# EAGLE board StepperSynth2.3_Interface (EAGLE 9.2.2)
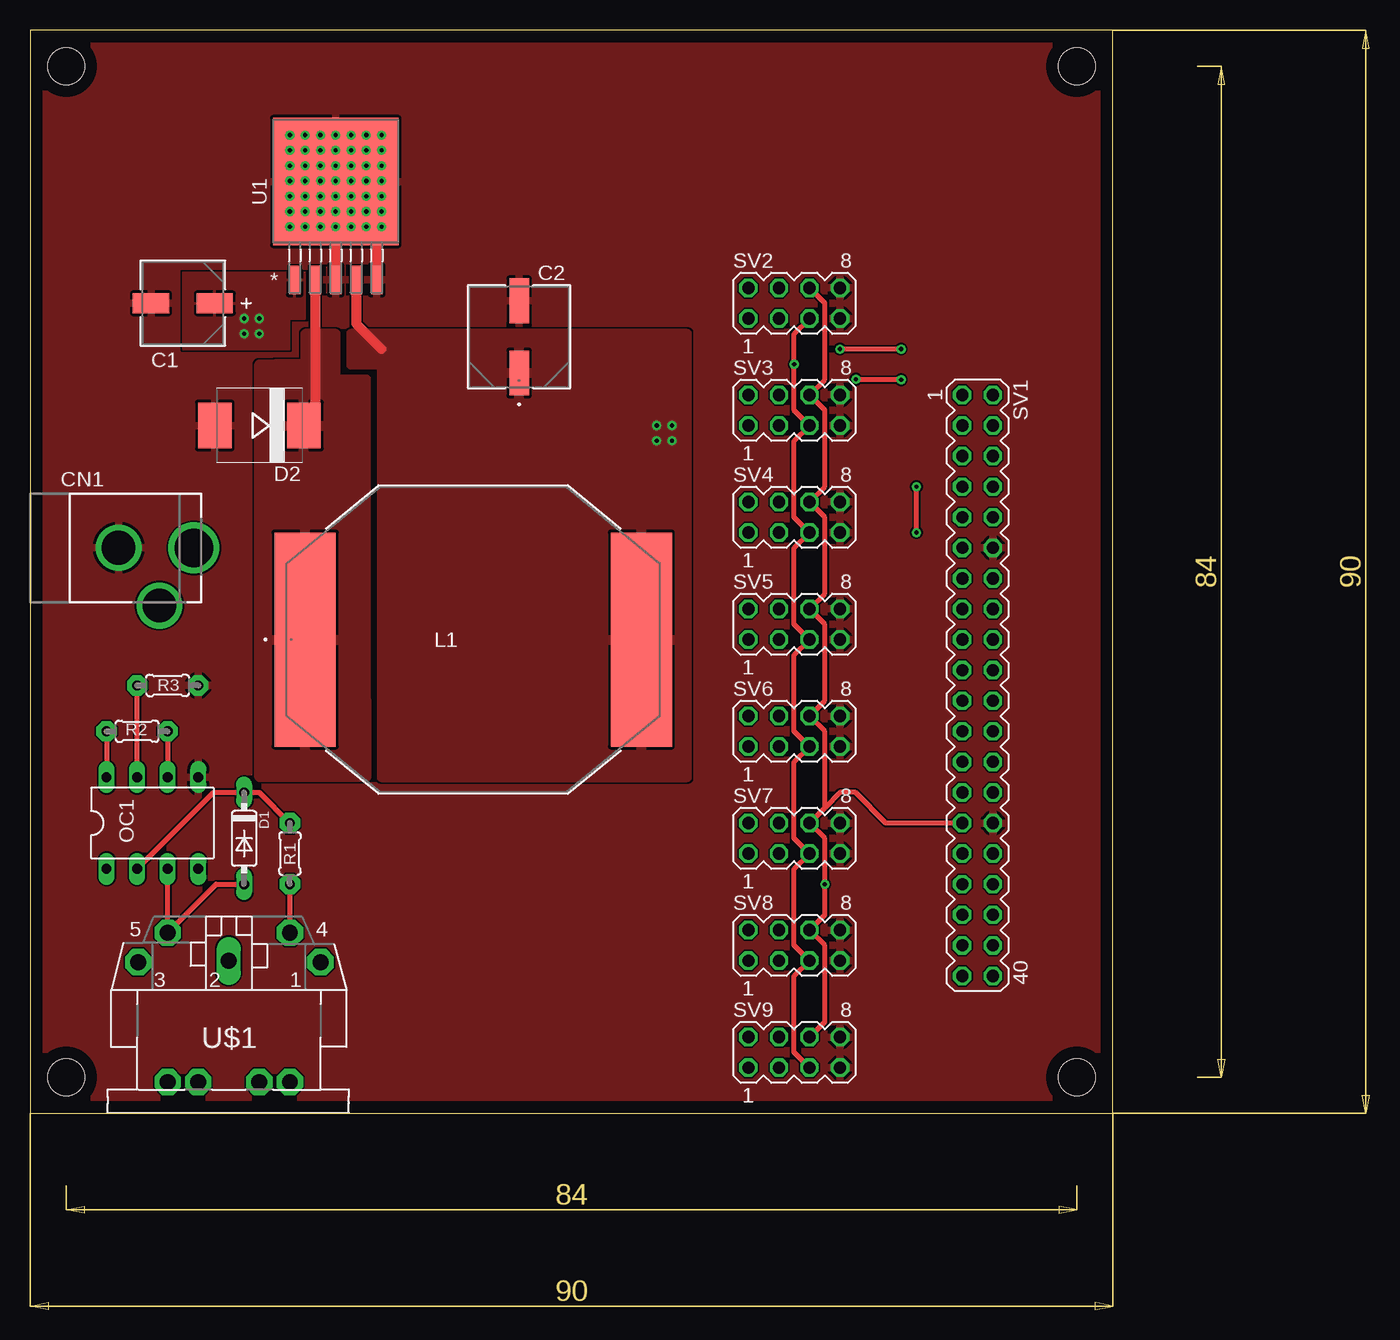
[diagram p0: board, top side]
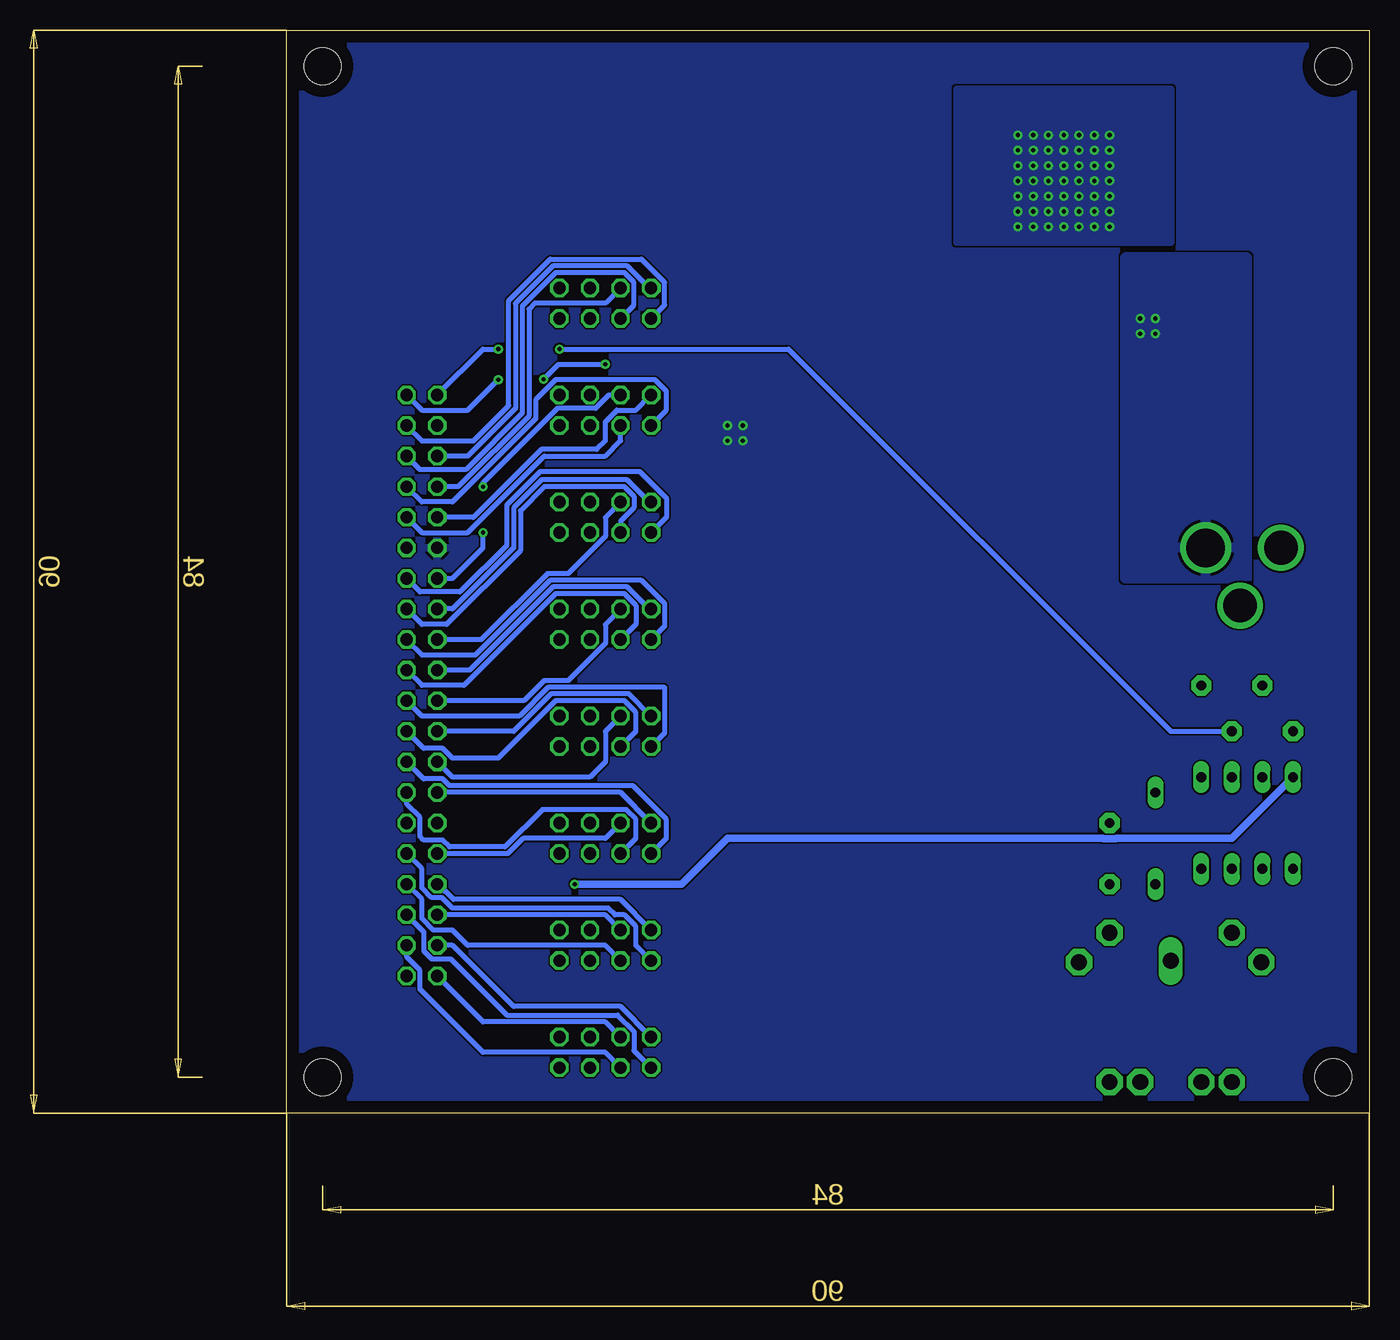
[diagram p1: board, bottom side, seen from below]

Size 90 x 90 mm. Coordinates in mm from the lower left corner, seen from the top.
Outline: 0,0 90,0 90,90 0,90 0,0
Copper layers (1*16): Top 0.035mm / dielectric 1.5mm / Bottom 0.035mm
Design rules "default": minimum track width 6mil, minimum drill 0.35mm, track to track 6mil, track to pad 6mil, pad to pad 6mil, via to via 6mil, smd to smd 6mil, copper to edge 40mil, drill to drill 6mil, minimum pad ring 10mil, minimum via ring 8mil, stop-mask expansion 4mil, vias tented up to drill 0mil, thermal gap 10mil
Holes 3.05 mm at 3,3 87,3 3,87 87,87

## Footprints (pad centres in the part's own frame; a part is rotated, then mirrored left to right if it is on the bottom)
PCAP_SVP_C6-L = smd 2.997 x 1.626: 1 -2.654,0; 2 2.654,0
U2-P-L = smd 3.708 x 1.626: 1 -2.997,0; 2 2.997,0
DCJACK_2MM_PTH = drill 2.8: GND 0,7.35; GNDBREAK 4.8,10.75 | drill 3.2: PWR 0,13.6
DO35-7 = drill 0.813 long: A 3.81,0; C -3.81,0
SMC = smd 2.8 x 3.8: A 3.7,0; C -3.7,0
IND_PM2110 = smd 5.08 x 17.78: 1 -13.97,0; 2 13.97,0
DIL08 = drill 0.813 long: 1 -3.81,-3.81; 2 -1.27,-3.81; 3 1.27,-3.81; 4 3.81,-3.81; 5 3.81,3.81; 6 1.27,3.81; 7 -1.27,3.81; 8 -3.81,3.81
0204/5 = drill 0.813 pad 1.676 octagon: 1 -2.54,0; 2 2.54,0
MA20-2 = drill 1.016 octagon: 1 -24.13,-1.27; 2 -24.13,1.27; 3 -21.59,-1.27; 4 -21.59,1.27; 5 -19.05,-1.27; 6 -19.05,1.27; 7 -16.51,-1.27; 8 -16.51,1.27; 9 -13.97,-1.27; 10 -13.97,1.27; 11 -11.43,-1.27; 12 -11.43,1.27; 13 -8.89,-1.27; 14 -8.89,1.27; 15 -6.35,-1.27; 16 -6.35,1.27; 17 -3.81,-1.27; 18 -3.81,1.27; 19 -1.27,-1.27; 20 -1.27,1.27; 21 1.27,-1.27; 22 1.27,1.27; 23 3.81,-1.27; 24 3.81,1.27; 25 6.35,-1.27; 26 6.35,1.27; 27 8.89,-1.27; 28 8.89,1.27; 29 11.43,-1.27; 30 11.43,1.27; 31 13.97,-1.27; 32 13.97,1.27; 33 16.51,-1.27; 34 16.51,1.27; 35 19.05,-1.27; 36 19.05,1.27; 37 21.59,-1.27; 38 21.59,1.27; 39 24.13,-1.27; 40 24.13,1.27
MA04-2 = drill 1.016 octagon: 1 -3.81,-1.27; 2 -3.81,1.27; 3 -1.27,-1.27; 4 -1.27,1.27; 5 1.27,-1.27; 6 1.27,1.27; 7 3.81,-1.27; 8 3.81,1.27
TS5B-L = smd 0.965 x 2.388: 1 -3.404,-8.23; 2 -1.702,-8.23; 3 0,-8.23; 4 1.702,-8.23; 5 3.404,-8.23 | smd 10.414 x 10.566: 6 0,-0.051
CP-2350 = drill 1.321 pad 2.184 octagon: 1 7.62,12.58; 3 -7.52,12.58; 4 5.08,15.02; 5 -5.08,15.02; PE -2.54,2.62; PE1 -5.08,2.62; PE2 5.08,2.62; PE@ 2.54,2.62 | drill 1.321 long: 2 0,12.68

## Placement (x,y rotation side)
C1  120uF  [PCAP_SVP_C6-L]  12.7,67.31 180 top
C2  470uF  [U2-P-L]  40.64,64.52 90 top
CN1  [DCJACK_2MM_PTH]  0,46.99 270 top
D1  1N914  [DO35-7]  17.78,22.86 270 top
D2  B540C  [SMC]  19.05,57.15 180 top
L1  PM2110-101K-RC  [IND_PM2110]  36.83,39.37 0 top
OC1  [DIL08]  10.16,24.13 0 top
R1  220  [0204/5]  21.59,21.59 270 top
R2  220  [0204/5]  8.89,31.75 0 top
R3  4.7k  [0204/5]  11.43,35.56 0 top
SV1  [MA20-2]  78.74,35.56 270 top
SV2  [MA04-2]  63.5,67.31 0 top
SV3  [MA04-2]  63.5,58.42 0 top
SV4  [MA04-2]  63.5,49.53 0 top
SV5  [MA04-2]  63.5,40.64 0 top
SV6  [MA04-2]  63.5,31.75 0 top
SV7  [MA04-2]  63.5,22.86 0 top
SV8  [MA04-2]  63.5,13.97 0 top
SV9  [MA04-2]  63.5,5.08 0 top
U1  LM2576SX-5.0/NOPBTS5B-L  [TS5B-L]  25.4,77.47 0 top
U$1  MIDIJACK  [CP-2350]  16.51,0 0 top

## Library data of the parts
C1 = Capacitor; MANUFACTURER_PART_NUMBER: 20SVPF120M; VENDOR: Panasonic
C2 = Capacitor; MANUFACTURER_PART_NUMBER: UUD1A471MNL1GS; VENDOR: Nichicon
CN1 R1-R3 U$1 = adafruit
D1 = Diodes
D2 = diode
L1 = Inductors; MANUFACTURER_PART_NUMBER: PM2110101KRC; VENDOR: Bourns Electronics
OC1 = optocoupler
SV1-SV9 = con-lstb; OC_FARNELL: unknown; OC_NEWARK: unknown
U1 = LM2576SX-5.0NOPB; MANUFACTURER_PART_NUMBER: LM2576SX5.0NOPB; VENDOR: Texas Instruments

## Nets
1A: SV1.4 SV2.1
1B: SV1.5 SV2.2
1C: SV1.6 SV2.3
1D: SV1.7 SV2.4
2A: SV1.8 SV3.1
2B: SV1.9 SV3.2
2C: SV1.10 SV3.3
2D: SV1.13 SV3.4
3A: SV1.14 SV4.1
3B: SV1.15 SV4.2
3C: SV1.16 SV4.3
3D: SV1.17 SV4.4
4A: SV1.18 SV5.1
4B: SV1.19 SV5.2
4C: SV1.20 SV5.3
4D: SV1.21 SV5.4
5A: SV1.22 SV6.1
5B: SV1.23 SV6.2
5C: SV1.24 SV6.3
5D: SV1.25 SV6.4
6A: SV1.26 SV7.1
6B: SV1.27 SV7.2
6C: SV1.28 SV7.3
6D: SV1.31 SV7.4
7A: SV1.32 SV8.1
7B: SV1.33 SV8.2
7C: SV1.34 SV8.3
7D: SV1.35 SV8.4
8A: SV1.36 SV9.1
8B: SV1.37 SV9.2
8C: SV1.38 SV9.3
8D: SV1.39 SV9.4
+3V3: OC1.8 R2.1 SV1.29 SV2.6 SV3.6 SV4.6 SV5.6 SV6.6 SV7.6 SV8.6 SV9.6
+5V: C2.1 L1.2 SV1.11 U1.4
+12V: C1.1 CN1.PWR U1.1
EN: SV1.2 SV2.5 SV3.5 SV4.5 SV5.5 SV6.5 SV7.5 SV8.5 SV9.5
GND: C1.2 C2.2 CN1.GND D2.A OC1.5 R3.2 SV1.12 SV1.30 SV2.7 SV2.8 SV3.7 SV3.8 SV4.7 SV4.8 SV5.7 SV5.8 SV6.7 SV6.8 SV7.7 SV7.8 SV8.7 SV8.8 SV9.7 SV9.8 U1.3 U1.5 U1.6
GNDBREAK: CN1.GNDBREAK
MIDI_RX: OC1.6 R2.2 SV1.1
N$1: R1.2 U$1.4
N$2: D1.C OC1.2 R1.1
N$3: D1.A OC1.3 U$1.5
N$4: OC1.7 R3.1
N$5: D2.C L1.1 U1.2

## Tracks (layer width: path | path; a pad name or v marks a point on that pad's centre or on a via)
1A
  Bottom 0.406: SV1.4 78.74,55.88 74.45,55.88 71.53,58.8 71.53,67.53 68.08,70.97 60.5,70.97 58.57,69.04 58.57,67.16 SV2.1
1B
  Bottom 0.406: SV2.2 59.86,68.58 61.69,70.41 67.85,70.41 70.97,67.29 70.97,58.57 74.93,54.61 SV1.5
1C
  Bottom 0.406: SV1.6 78.89,53.49 75.09,53.49 70.41,58.17 70.41,67.06 67.62,69.85 61.92,69.85 61.11,69.04 61.11,67.16 SV2.3
1D
  Bottom 0.406: SV1.7 75.72,52.07 69.85,57.94 69.85,66.83 69.37,67.31 63.5,67.31 SV2.4
2A
  Bottom 0.406: SV1.8 78.74,50.8 76.2,50.8 69.29,57.71 69.29,59.29 67.62,60.96 59.38,60.96 58.42,60 58.42,58.42 SV3.1
2B
  Bottom 0.406: SV3.2 60.96,58.42 62.54,58.42 63.5,57.46 63.5,55.88 64.21,55.17 68.81,55.17 74.45,49.53 SV1.9
2C
  Bottom 0.406: SV1.10 78.74,48.26 74.93,48.26 68.58,54.61 63.5,54.61 62.23,55.88 SV3.3
2D  (via drill 0.35)
  Top 0.406: v73.66,48.26 v73.66,52.07
  Bottom 0.406: SV1.13 76.2,44.45 73.66,46.99 v73.66,48.26 | SV3.4 63.19,59.69 64.31,58.57 67.47,58.57 73.66,52.38 v73.66,52.07
3A
  Bottom 0.406: SV4.1 58.42,49.53 58.42,51.11 60.65,53.34 68.89,53.34 71.68,50.55 71.68,47.22 75.57,43.33 78.89,43.33 SV1.14
3B
  Bottom 0.406: SV4.2 59.86,50.8 61.69,52.63 68.81,52.63 71.12,50.32 71.12,46.99 76.2,41.91 SV1.15
3C
  Bottom 0.406: SV1.16 78.74,40.64 76.68,40.64 70.56,46.76 70.56,50.09 68.58,52.07 61.92,52.07 61.11,51.26 61.11,50.34 62.23,49.22 SV4.3
3D
  Bottom 0.406: SV4.4 63.5,49.53 63.5,47.95 66.59,44.86 68.31,44.86 73.8,39.37 SV1.17
4A
  Bottom 0.406: SV1.18 78.74,38.1 74.28,38.1 68.08,44.3 60.5,44.3 58.57,42.37 58.57,40.49 SV5.1
4B
  Bottom 0.406: SV5.2 59.86,41.91 61.69,43.74 67.85,43.74 74.76,36.83 SV1.19
4C
  Bottom 0.406: SV1.20 78.74,35.56 75.24,35.56 67.62,43.18 61.92,43.18 60.96,42.22 60.96,40.64 SV5.3
4D
  Bottom 0.406: SV5.4 63.5,40.64 63.5,39.06 66.59,35.97 68.58,35.97 70.26,34.29 SV1.21
5A
  Bottom 0.406: SV1.22 78.74,33.02 70.64,33.02 68.25,35.41 58.57,35.41 58.57,31.6 SV6.1
5B
  Bottom 0.406: SV6.2 61.52,34.85 68.02,34.85 71.12,31.75 SV1.23
5C
  Bottom 0.406: SV6.3 60.96,31.75 60.96,33.33 61.92,34.29 67.62,34.29 72.39,29.52 76.2,29.52 77.01,30.33 78.59,30.33 SV1.24
5D
  Bottom 0.406: SV6.4 63.5,31.75 63.5,29.21 64.77,27.94 76.2,27.94 SV1.25
6A
  Bottom 0.406: SV7.1 58.42,22.86 58.42,24.44 61.21,27.23 76.45,27.23 77.01,27.79 78.59,27.79 SV1.26
6B
  Bottom 0.406: SV7.2 62.23,26.67 SV1.27
6C
  Bottom 0.406: SV7.3 60.96,22.86 60.96,24.44 61.77,25.25 68.73,25.25 71.83,22.15 76.45,22.15 77.01,22.71 78.59,22.71 78.89,23.01 78.89,24.59 80.01,25.71 SV1.28
6D
  Bottom 0.406: SV7.4 63.5,22.86 70.33,22.86 71.6,21.59 SV1.31
7A
  Bottom 0.406: SV8.1 60.96,13.97 60.96,15.55 61.92,16.51 62.71,16.51 63.27,17.07 76.2,17.07 77.06,17.93 77.93,17.93 78.74,18.74 78.74,20.32 SV1.32
7B
  Bottom 0.406: SV8.2 62.23,17.78 76.12,17.78 76.83,18.49 76.91,18.49 SV1.33
7C
  Bottom 0.406: SV8.3 63.5,13.97 74.93,13.97 76.2,15.24 77.78,15.24 78.74,16.2 78.74,17.78 SV1.34
7D
  Bottom 0.406: SV8.4 63.5,16.51 SV1.35
8A
  Bottom 0.406: SV1.36 78.59,15.09 78.59,13.51 77.93,12.85 76.35,12.85 71.68,8.18 62.48,8.18 61.11,6.81 61.11,5.23 SV9.1
8B
  Bottom 0.406: SV9.2 62.23,8.89 71.12,8.89 76.2,13.97 SV1.37
8C
  Bottom 0.406: SV9.3 63.5,5.08 73.66,5.08 78.89,10.31 78.89,11.89 80.01,13.01 SV1.38
8D
  Bottom 0.406: SV9.4 63.5,7.62 73.66,7.62 SV1.39
+3V3  (via drill 0.35)
  Top 0.406: R2.1 OC1.8 | SV9.6 66.04,7.62 66.04,13.97 SV8.6 66.04,16.51 v66.04,19.05 66.04,22.86 SV7.6 66.04,25.4 | 66.04,25.4 66.04,31.75 SV6.6 66.04,34.29 66.04,40.64 SV5.6 66.04,43.18 66.04,49.53 SV4.6 66.04,52.07 66.04,58.42 SV3.6 66.04,60.96 66.04,67.31 SV2.6 | SV1.29 71.12,24.13 68.58,26.67 67.31,26.67 66.04,25.4
  Bottom 0.61: v66.04,19.05 57.15,19.05 53.34,22.86 22.15,22.86 22.13,22.84 21.05,22.84 21.03,22.86 11.43,22.86 OC1.8
+5V  (via drill 0.35)
  Top 0.813: U1.4 27.1,65.61 29.21,63.5
  other vias: 52.07,57.15 53.34,57.15 52.07,55.88 53.34,55.88
  pour Top: 29.21,64.77 26.67,64.77 26.67,62.23 29.21,62.23 29.21,27.94 54.61,27.94 54.61,62.23 54.61,64.77
  pour Bottom (rank 2): -1.27,91.44 91.44,91.44 91.44,-1.27 -1.27,-1.27
+12V  (via drill 0.35)
  other vias: 19.05,64.77 17.78,64.77 17.78,66.04 19.05,66.04
  pour Top: 22.86,66.04 22.86,69.85 12.7,69.85 12.7,63.5 21.59,63.5 21.59,66.04
  pour Bottom: 16.51,44.45 10.16,44.45 10.16,71.12 20.32,71.12 20.32,44.45
EN  (via drill 0.35)
  Top 0.406: SV9.5 63.5,5.08 63.5,11.43 SV8.5 63.5,13.97 63.5,20.32 SV7.5 63.5,22.86 63.5,29.21 SV6.5 63.5,31.75 63.5,38.1 SV5.5 63.5,40.64 63.5,46.99 SV4.5 63.5,49.53 63.5,55.88 SV3.5 63.5,58.42 v63.5,62.23 63.5,64.77 SV2.5 | v72.39,60.96 68.58,60.96 v68.62,61
  Bottom 0.406: SV1.2 78.74,58.42 74.93,58.42 v72.39,60.96 | v68.62,61 67.39,62.23 v63.5,62.23
GND  (via drill 0.35)
  Top 0.152: 25.45,77.42 U1.6
  Top 0.813: U1.5 28.8,74.78 28.96,74.93 | U1.3 25.4,76.96 25.65,77.22
  other vias: 21.59,81.28 22.86,81.28 24.13,81.28 25.4,81.28 26.67,81.28 27.94,81.28 29.21,81.28 21.59,80.01 22.86,80.01 24.13,80.01 25.4,80.01 26.67,80.01 27.94,80.01 29.21,80.01 21.59,78.74 22.86,78.74 24.13,78.74 25.4,78.74 26.67,78.74 27.94,78.74 29.21,78.74 21.59,77.47 22.86,77.47 24.13,77.47 25.4,77.47 26.67,77.47 27.94,77.47 29.21,77.47 21.59,76.2 22.86,76.2 24.13,76.2 25.4,76.2 26.67,76.2 27.94,76.2 29.21,76.2 21.59,74.93 22.86,74.93 24.13,74.93 25.4,74.93 26.67,74.93 27.94,74.93 29.21,74.93 21.59,73.66 22.86,73.66 24.13,73.66 25.4,73.66 26.67,73.66 27.94,73.66 29.21,73.66
  pour Top: 24.64,70.87 24.64,66.04 26.16,66.04 26.16,73.15 24.64,73.15
  pour Top: 28.19,66.04 28.19,73.15 29.46,73.15 29.72,72.9 29.72,66.04
  pour Bottom: 16.51,72.39 34.29,72.39 34.29,85.09 16.51,85.09
  pour Top (rank 2): -1.27,91.44 91.44,91.44 91.44,-1.27 -1.27,-1.27
MIDI_RX  (via drill 0.35)
  Top 0.406: R2.2 OC1.6 | v72.39,63.5 v67.31,63.5
  Bottom 0.406: SV1.1 73.66,63.5 v72.39,63.5 | v67.31,63.5 48.26,63.5 16.51,31.75 R2.2
N$1
  Top 0.406: R1.2 U$1.4
N$2
  Top 0.406: OC1.2 15.24,26.67 D1.C 19.05,26.67 R1.1
N$3
  Top 0.406: OC1.3 U$1.5 15.46,19.05 D1.A
N$4
  Top 0.406: OC1.7 R3.1
N$5
  Top 0.406: 22.8,57.2 D2.C
  Top 0.813: U1.2 23.7,58.1 22.8,57.2
  pour Top: 24.13,64.77 22.86,64.77 22.86,62.23 20.32,62.23 20.32,30.48 27.94,30.48 27.94,60.96 25.4,60.96 25.4,64.77
  pour Top: 27.94,30.48 27.94,27.94 19.05,27.94 19.05,62.23 24.13,62.23 25.4,60.96 25.4,53.34 26.67,52.07 26.67,35.56 27.94,34.29

## Text on the board
tValues: LM2576 | 120uF | 470uF | CH1 | CH2 | 100uH | CH3 | CH4 | CH5 | CH6 | 6N138 | CH7 | Jonathan Kayne 2019 | MIDI Stepper Synth V2 / Interface Board / Virginia Tech ECE | CH8